# EAGLE board tvbgone (EAGLE 7.3.0)
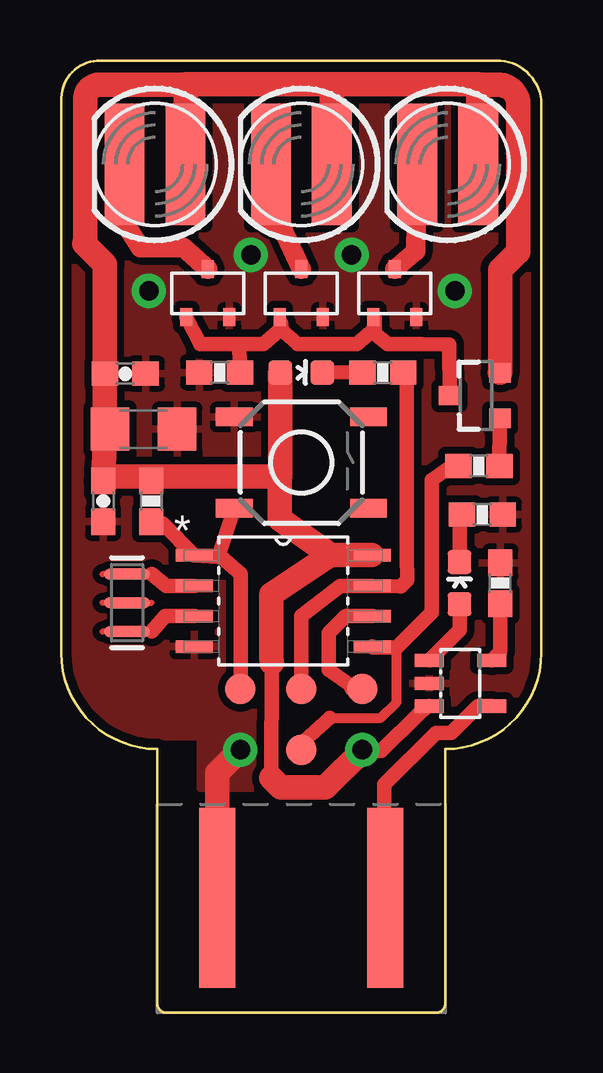
[diagram p0: board, top side]
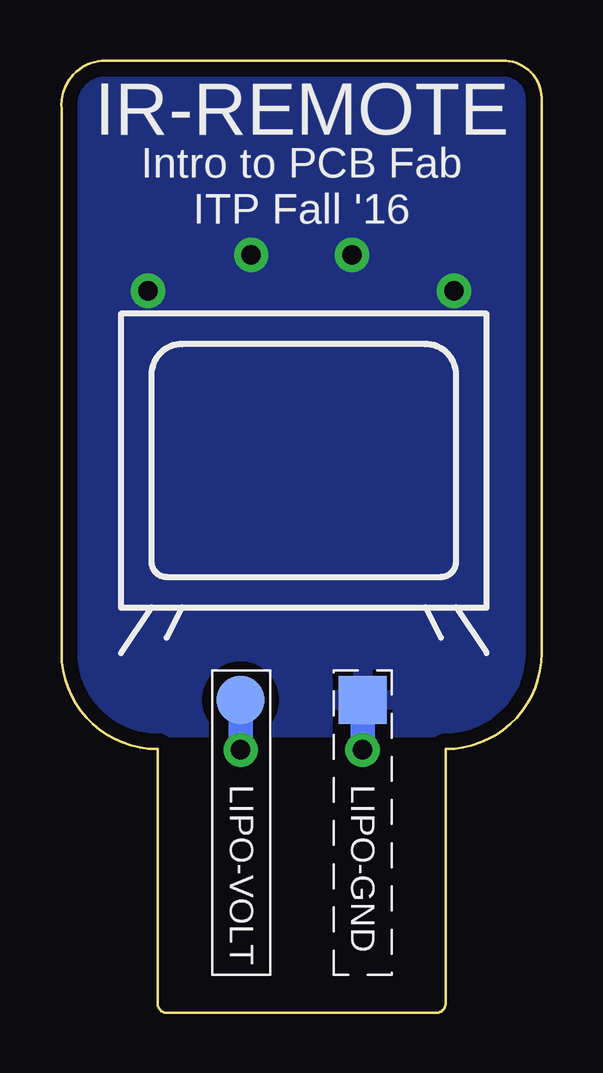
[diagram p1: board, bottom side, seen from below]

Size 20.01 x 39.7 mm. Coordinates in mm from the lower left corner, seen from the top.
Outline: 20,15 20,37.7 arc90 18.3,39.7 1.5,39.7 arc90 0,38 0,15 arc90 4,11 4,0.4 arc90 4.4,0 15.6,0 arc90 16,0.4 16,11 arc90 20,15
Copper layers (1*16): Top 0.0356mm / dielectric 1.5011mm / Bottom 0.0356mm
Design rules "LaenPCBOrder": minimum track width 6mil, minimum drill 13mil, track to track 6mil, track to pad 6mil, pad to pad 6mil, via to via 6mil, smd to smd 6mil, copper to edge 15mil, drill to drill 6mil, minimum pad ring 7mil, minimum via ring 7mil, stop-mask expansion 3mil, vias tented up to drill 0mil, thermal gap 10mil

## Footprints (pad centres in the part's own frame; a part is rotated, then mirrored left to right if it is on the bottom)
C1206 = smd 1.6 x 1.8: 1 -1.4,0; 2 1.4,0
0603-CAP = smd 1.1 x 1: 1 -0.85,0; 2 0.85,0
5MM-SIDE = smd 1.651 x 5.08: A -1.27,0; K 1.27,0
LED-0603 = smd 1 x 1: A 0,-0.877; C 0,0.877
SOT23-5L = smd 0.55 x 1.2: 1 -0.95,-1.3; 2 0,-1.3; 3 0.95,-1.3; 4 0.95,1.3; 5 -0.95,1.3
SOT23-3 = smd 0.8 x 0.9: 1 -0.95,-1; 2 0.95,-1; 3 0,1.1
SOT-23-R = smd 0.5 x 0.75: 1-BASE -0.9,-1; 2-COLLECTOR 0,1; 3-EMITTER 0.9,-1
0603-RES = smd 1.1 x 1: 1 -0.85,0; 2 0.85,0
TACTILE-SWITCH-SMD = smd 1.524 x 0.762: 1 -2.794,1.905; 2 2.794,1.905; 3 -2.794,-1.905; 4 2.794,-1.905
PAD.03X.05 = smd 1.27 x 1.27: P$1 0,0
TP20SQ = smd 2 x 2: TP 0,0
TP20R = smd 2 x 2: TP 0,0
SOIC127P798X216-8N = smd 1.549 x 0.533: 1 -3.708,1.905; 2 -3.708,0.635; 3 -3.708,-0.635; 4 -3.708,-1.905; 5 3.708,-1.905; 6 3.708,-0.635; 7 3.708,0.635; 8 3.708,1.905
USB-A-PCB-POWER-ONLY = smd 7.5 x 1.5: 5V -0.2,-3.5; GND -0.2,3.5
RESONATOR-SMD = smd 0.45 x 1.905: 1 -1.2,0; 2 0,0; 3 1.2,0

## Placement (x,y rotation side)
C1  [C1206]  3.43,24.34 0 top
C3  10uF  [0603-CAP]  2.67,26.65 0 top
C7  0.1uF  [0603-CAP]  1.75,21.33 270 top
LED1  LED  [5MM-SIDE]  16.1,35.37 180 top
LED2  LED  [5MM-SIDE]  3.91,35.37 180 top
LED3  LED  [5MM-SIDE]  10,35.37 180 top
LED4  [LED-0603]  10,26.7 270 top
LED5  [LED-0603]  16.6,17.92 0 top
LIPO  MCP73831/OT  [SOT23-5L]  16.63,13.74 270 top
Q1  PMBT3906  [SOT23-3]  17.28,25.74 90 top
Q2  [SOT-23-R]  13.9,30 0 top
Q8  [SOT-23-R]  6.1,30 0 top
Q9  [SOT-23-R]  10,30 0 top
R1  500  [0603-RES]  13.4,26.7 180 top
R2  1k  [0603-RES]  17.55,20.77 0 top
R3  2k  [0603-RES]  18.29,17.92 90 top
R4  1k  [0603-RES]  17.4,22.8 0 top
R5  500  [0603-RES]  3.75,21.33 270 top
R6  10k  [0603-RES]  6.6,26.7 0 top
S1  [TACTILE-SWITCH-SMD]  10,22.94 0 top
TP3  TEST-POINT3X5  [PAD.03X.05]  7.46,13.51 0 top
TP4  TEST-POINT3X5  [PAD.03X.05]  12.54,13.51 0 top
TP5  TEST-POINT3X5  [PAD.03X.05]  10,10.97 0 top
TP6  TEST-POINT3X5  [PAD.03X.05]  10,13.51 0 top
TP7  TPTP20SQ  [TP20SQ]  7.46,13.05 0 bottom
TP8  TPTP20R  [TP20R]  12.54,13.05 0 bottom
U2  ATTINY85V-10SU  [SOIC127P798X216-8N]  9.25,17.18 0 top
U$1  USB-POWER-ONLY  [USB-A-PCB-POWER-ONLY]  10,5 90 top
Y1  8MHZ  [RESONATOR-SMD]  2.75,17.1 90 top

## Library data of the parts
C1 LIPO = adafruit
C3 C7 LED4 LED5 R1-R6 = homemade-hardware
LED1-LED3 = tvbgone
Q1 = SparkFun-DiscreteSemi; PROD_ID: TRANS-08052
Q2 Q8 Q9 = Tomorrow_Lab_LLC
S1 = SparkFun-Electromechanical
TP3-TP6 = SparkFun-Passives
TP7 TP8 = testpad
U2 = Atmel_By_element14_Batch_1; MPN: ATTINY85V-10SU; OC_FARNELL: 1455166; OC_NEWARK: 58M3799; PACKAGE: SOIC-8; SUPPLIER: Atmel
U$1 = Andy_Sigler
Y1 = homemade-hardware; PROD_ID: XTAL-08895

## Nets
5V: LIPO.4 U$1.5V
GND: C1.2 C3.2 C7.2 LIPO.2 Q2.3-EMITTER Q8.3-EMITTER Q9.3-EMITTER R2.2 R3.2 R6.1 S1.1 TP7.TP U2.4 U$1.GND Y1.2
MISO: TP4.P$1 U2.6
MOSI: R4.1 TP5.P$1 U2.5
N$1: U2.3 Y1.1
N$2: U2.2 Y1.3
N$3: LED4.C R1.2
N$4: LED1.K Q2.2-COLLECTOR
N$5: LED2.K Q8.2-COLLECTOR
N$6: Q1.1 R4.2
N$7: LED3.K Q9.2-COLLECTOR
N$8: LIPO.5 R3.1
N$9: LED5.C R2.1
N$10: Q1.3 Q2.1-BASE Q8.1-BASE Q9.1-BASE R6.2
N$11: LED5.A LIPO.1
RST: R5.2 S1.3 TP3.P$1 U2.1
SCK: R1.1 TP6.P$1 U2.7
VCC: C1.1 C3.1 C7.1 LED1.A LED2.A LED3.A LED4.A LIPO.3 Q1.2 R5.1 TP8.TP U2.8

## Tracks (layer width: path | path; a pad name or v marks a point on that pad's centre or on a via)
5V
  Top 0.61: LIPO.4 17.37,12.79 16.26,11.68 15.62,11.68 13.46,9.53 13.46,4.84 U$1.5V
GND  (via drill 0.82 pad 1.42)
  Top 1.016: U$1.GND 6.5,10.01 v7.46,10.97
  Bottom 1.016: TP7.TP v7.46,10.97
  other vias: 7.9,31.6 12.1,31.6 3.65,30.1 16.4,30.1
  pour Bottom (isolate 0.61): -1,40 21,40 21,11.9 -1,11.9
  pour Top (isolate 0.305): -1,40.5 20.5,40.5 20.5,11.5 8.32,11.5 8.32,9.36 5.8,9.36 5.8,11.5 -1,11.5
MISO
  Top 0.406: 12,13.7 12.1,13.5
  Top 0.61: U2.6 11.85,16.54 11.16,15.85 11.16,14.29 12,13.7 | 12.1,13.5 TP4.P$1
MOSI
  Top 0.406: R4.1 16.31,22.83 | 12.97,15.26 U2.5 12.96,15.26 12.61,15.26 12.61,15.25 12.62,15.25 | TP5.P$1 9.72,10.97 | 11.18,12.3 13.32,12.3 13.97,12.95 13.97,15.24
  Top 0.61: 16.31,22.83 15.43,22.21 15.43,16.7 13.97,15.24 12.99,15.24 U2.5 | 9.72,10.97 11.18,12.3
N$1
  Top 0.61: U2.3 4.34,16.54 3.76,15.9
N$2
  Top 0.61: U2.2 4.38,17.81 3.76,18.3
N$3
  Top 0.406: 11.21,26.71 LED4.C
  Top 0.61: R1.2 11.21,26.71
N$4
  Top 0.813: LED1.K 14.77,31.75 Q2.2-COLLECTOR
N$5
  Top 0.813: LED2.K 2.64,32.92 3.3,31.91 5.1,31.91 Q8.2-COLLECTOR
N$6
  Top 0.406: 18.27,24.58 Q1.1
  Top 0.61: R4.2 18.27,24.58
N$7
  Top 0.813: LED3.K 8.74,32.99 9.18,32.76 Q9.2-COLLECTOR
N$8
  Top 0.61: R3.1 18.29,15.1 LIPO.5
N$9
  Top 0.61: LED5.C 16.6,20.68 R2.1
N$10
  Top 0.406: Q2.1-BASE 13.04,28.51 | 7.42,27.7 7.6,27.88
  Top 0.5: Q9.1-BASE 9.17,28.73 | 13.06,28.96 Q2.1-BASE
  Top 0.61: Q8.1-BASE 5.79,27.88 7.6,27.88 8.41,27.88 9.14,28.5 | 9.17,28.73 9.14,28.5 | Q1.3 16.16,27.87 15.01,27.88 13.61,27.88 13.06,28.33 13.06,28.96 | 13.04,28.51 12.31,27.88 9.86,27.88 9.14,28.5 | R6.2 7.42,27.7
N$11
  Top 0.61: LED5.A 16.6,15.96 LIPO.1
RST
  Top 0.406: TP3.P$1 7.42,13.5 7.48,13.51 | 6.67,19 5.62,19 U2.1
  Top 0.61: S1.3 6.54,19.01 U2.1 4.22,20.4 R5.2 | 7.48,13.51 7.48,18.29 6.67,19
SCK
  Top 0.406: R1.1 14.41,26.45
  Top 0.61: 14.41,26.45 14.41,19.03 14.41,18.05 14.15,17.79 U2.7 11.62,17.81 10,16.55 TP6.P$1
VCC  (via drill 0.82 pad 1.42)
  Top 0.61: 12.57,10.97 v12.54,10.97 12.59,10.92 13.34,10.92 14.95,12.54 LIPO.3 | 12.94,19.1 U2.8 | 8.77,14.59 8.75,9.8
  Top 0.813: 5.18,38.71 5.18,38.8 arc-90 5.17,38.7 | 1,32.11 arc-90 0.96,32.07 | 17.39,38.7 arc-90 17.37,38.71 | 9.22,22.61 9.11,22.8
  Top 1.016: 11.28,38.71 17.37,38.71 LED1.A | 11.28,38.71 5.18,38.71 LED2.A | LED3.A 11.28,38.71 | 5.17,38.7 1.6,38.7 arc90 1,38.1 1,32.11 | 17.39,38.7 18.2,38.7 arc-90 19.05,37.85 19.05,31.72 19.02,31.72 18.29,30.99 Q1.2 | 12.57,10.97 11,9.4 9.15,9.4 8.75,9.8 | 11.21,19.1 8.75,17.45 8.75,14.86 8.77,14.59 | 11.21,19.1 12.94,19.1 | 11.21,19.1 9.11,20.59 9.11,22.8 9.13,22.82 | 0.96,32.07 1.82,31.21 C3.1 1.82,24.34 | LED4.A 9.13,22.82 | 9.13,22.82 9.13,22.37 3.68,22.37 | 1.82,24.34 C1.1 | 1.82,24.34 1.82,23.87 C7.1 1.93,22.37 3.68,22.37 | 3.68,22.37 3.68,22.17 R5.1
  Bottom 1.016: TP8.TP v12.54,10.97

## Text on the board
bPlace: IR-REMOTE | Intro to PCB Fab / ITP Fall '16 | LIPO-GND | LIPO-VOLT